# EAGLE board nutzen_02 (EAGLE 9.6.2), part 1 of 3
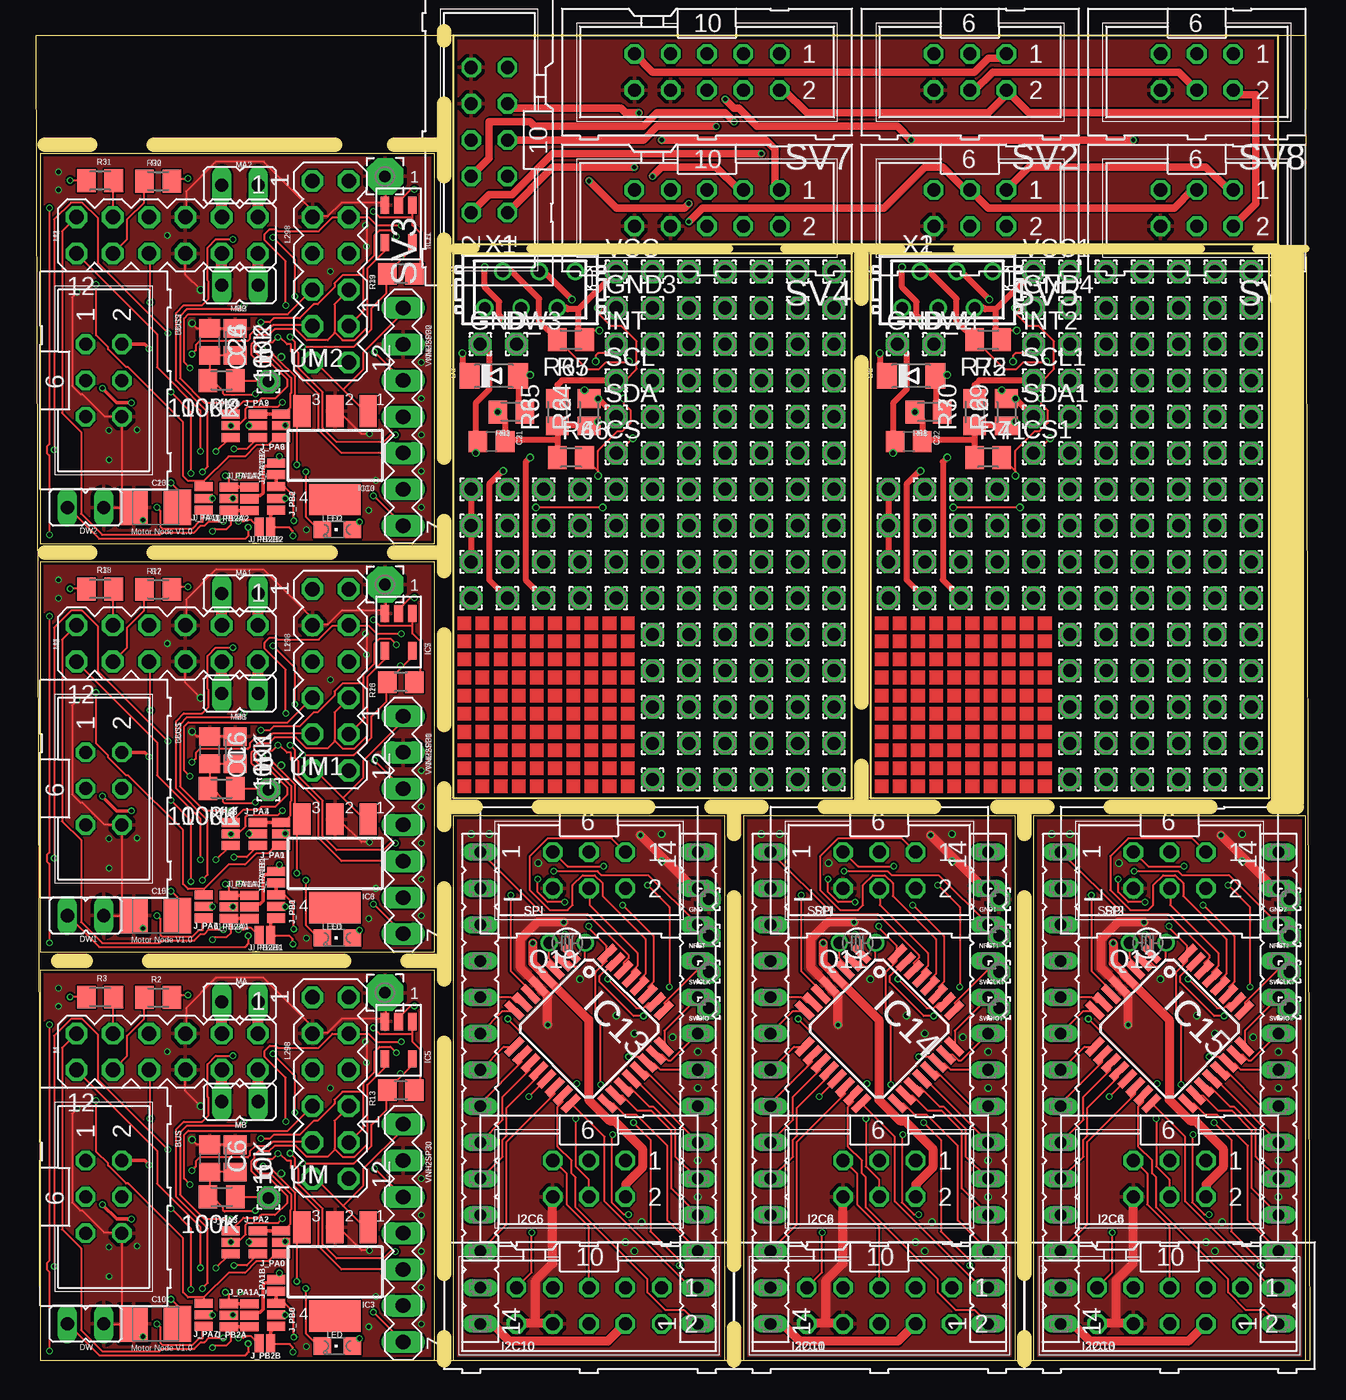
[diagram p0: board, top side]
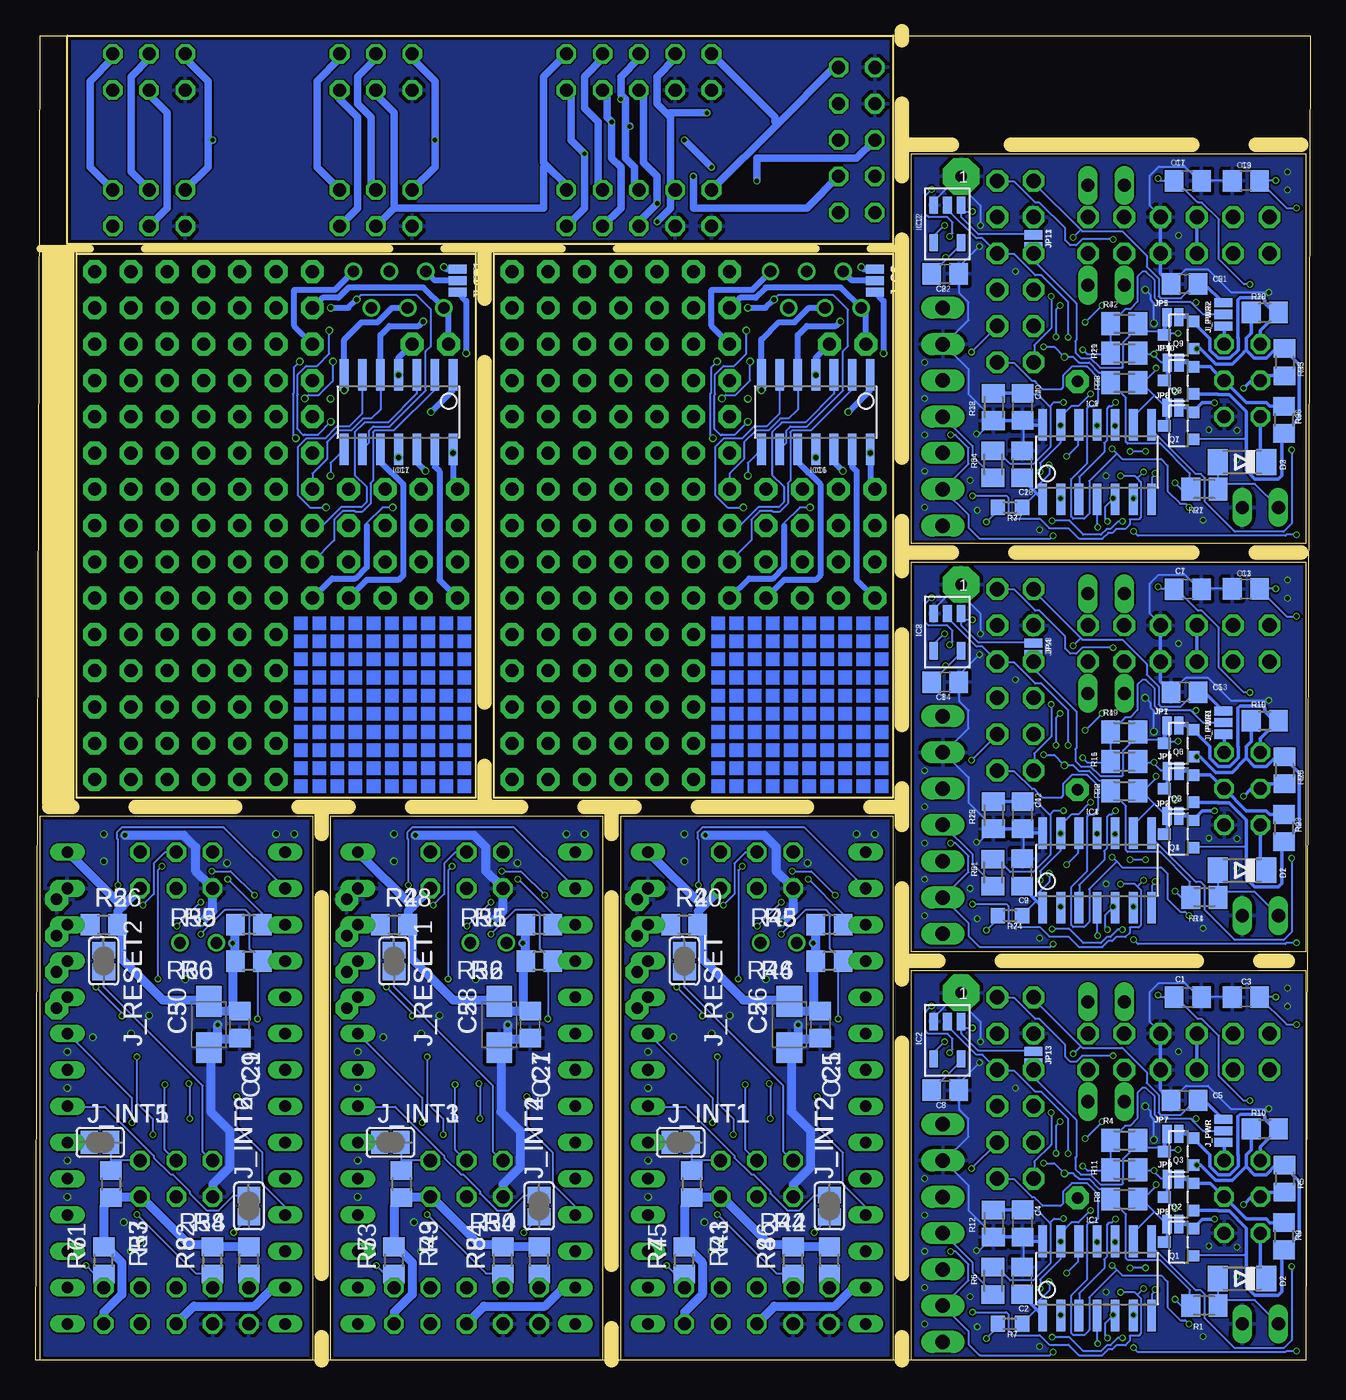
[diagram p1: board, bottom side, seen from below]

Size 89.22 x 92.71 mm. Coordinates in mm from the lower left corner, seen from the top.
Outline: 0.32,0 27.93,0 27.93,27.3 0.32,27.3 0.32,0
Outline: 0.32,0 89.22,0 88.9,92.71 0,92.71 0.32,0
Outline: 0.32,28.57 27.93,28.57 27.93,55.87 0.32,55.87 0.32,28.57
Outline: 0.32,57.15 27.93,57.15 27.93,84.44 0.32,84.44 0.32,57.15
Outline: 29.21,0 48.26,0 48.26,38.1 29.21,38.1 29.21,0
Outline: 49.53,0 68.58,0 68.58,38.1 49.53,38.1 49.53,0
Outline: 69.85,0 88.9,0 88.9,38.1 69.85,38.1 69.85,0
Outline: 29.21,39.37 57.15,39.37 57.15,77.47 29.21,77.47 29.21,39.37
Outline: 58.42,39.37 86.36,39.37 86.36,77.47 58.42,77.47 58.42,39.37
Outline: 29.21,78.11 86.99,78.11 86.99,92.71 29.21,92.71 29.21,78.11
Copper layers (1*16): Top 0.035559375mm / dielectric 1.6mm / Bottom 0.035559375mm
Design rules "jlcpcb2layer": minimum track width 5mil, minimum drill 12mil, track to track 5mil, track to pad 5mil, pad to pad 5mil, via to via 5mil, smd to smd 5mil, copper to edge 8mil, drill to drill 6mil, minimum pad ring 5mil, minimum via ring 3mil, stop-mask expansion 2.5mil, vias tented up to drill 0mil, thermal gap 10mil
Net classes: 1 GND: width 0.635 mm; 2 Power: width 0.635 mm
Milling: 77 lines

## Footprints (pad centres in the part's own frame; a part is rotated, then mirrored left to right if it is on the bottom)
M0805 = smd 1.3 x 1.6: 1 -0.95,0; 2 0.95,0
ML6 = drill 0.914 octagon: 1 -2.54,-1.27; 2 -2.54,1.27; 3 0,-1.27; 4 0,1.27; 5 2.54,-1.27; 6 2.54,1.27
C0805 = smd 1.3 x 1.5: 1 -0.95,0; 2 0.95,0
B/3528-21R = smd 1.95 x 2.5: + 1.525,0; - -1.525,0
B/3528-21W = smd 2.15 x 1.8: + 1.625,0; - -1.625,0
1,6/0,9 = drill 0.914 pad 1.6 octagon: 1 0,0
MINIMELF = smd 1.4 x 1.8: A 1.7,0; C -1.7,0
JP1 = drill 0.914 long: 1 0,-1.27; 2 0,1.27
1,6/0,8 = drill 0.813 pad 1.6 octagon: 1 0,0
ML10 = drill 0.914 octagon: 1 -5.08,-1.27; 2 -5.08,1.27; 3 -2.54,-1.27; 4 -2.54,1.27; 5 0,-1.27; 6 0,1.27; 7 2.54,-1.27; 8 2.54,1.27; 9 5.08,-1.27; 10 5.08,1.27
SOIC14 = smd 0.61 x 2.21: 1 -3.81,-2.603; 2 -2.54,-2.603; 3 -1.27,-2.603; 4 0,-2.603; 5 1.27,-2.603; 6 2.54,-2.603; 7 3.81,-2.603; 8 3.81,2.603; 9 2.54,2.603; 10 1.27,2.603; 11 0,2.603; 12 -1.27,2.603; 13 -2.54,2.603; 14 -3.81,2.603
SOT-23/5 = smd 0.6 x 1.2: 1 -0.95,-1.306; 2 0,-1.306; 3 0.95,-1.306; 4 0.95,1.306; 5 -0.95,1.306
SOT223 = smd 1.219 x 2.235: 1 -2.311,-3.099; 2 0,-3.099; 3 2.311,-3.099 | smd 3.6 x 2.2: 4 0,3.099
LQFP-32 = smd 1.5 x 0.5: 1 -1.8,0; 2 -1.8,-0.8; 3 -1.8,-1.6; 4 -1.8,-2.4; 5 -1.8,-3.2; 6 -1.8,-4; 7 -1.8,-4.8; 8 -1.8,-5.6; 17 7.4,-5.6; 18 7.4,-4.8; 19 7.4,-4; 20 7.4,-3.2; 21 7.4,-2.4; 22 7.4,-1.6; 23 7.4,-0.8; 24 7.4,0 | smd 0.5 x 1.5: 9 0,-7.4; 10 0.8,-7.4; 11 1.6,-7.4; 12 2.4,-7.4; 13 3.2,-7.4; 14 4,-7.4; 15 4.8,-7.4; 16 5.6,-7.4; 25 5.6,1.8; 26 4.8,1.8; 27 4,1.8; 28 3.2,1.8; 29 2.4,1.8; 30 1.6,1.8; 31 0.8,1.8; 32 0,1.8
SMT-JUMPER_3_1-NC_PASTE_NO-SILK = smd 0.635 x 1.27: 1 -0.813,0; 2 0,0; 3 0.813,0
SJ = smd 1.168 x 1.6: 1 -0.762,0; 2 0.762,0
SMT-JUMPER_2_NO_NO-SILK = smd 0.635 x 1.27: 1 -0.406,0; 2 0.406,0
SMT-JUMPER_2_NC_PASTE_NO-SILK = smd 0.635 x 1.27: 1 -0.406,0; 2 0.406,0
FE14 = drill 0.813 long: 1 -15.24,0; 2 -12.7,0; 3 -10.16,0; 4 -7.62,0; 5 -5.08,0; 6 -2.54,0; 7 0,0; 8 2.54,0; 9 5.08,0; 10 7.62,0; 11 10.16,0; 12 12.7,0; 13 15.24,0; 14 17.78,0
MA06-2 = drill 1.016 octagon: 1 -6.35,-1.27; 2 -6.35,1.27; 3 -3.81,-1.27; 4 -3.81,1.27; 5 -1.27,-1.27; 6 -1.27,1.27; 7 1.27,-1.27; 8 1.27,1.27; 9 3.81,-1.27; 10 3.81,1.27; 11 6.35,-1.27; 12 6.35,1.27
CHIPLED_0805 = smd 1.2 x 1.2: A 0,-1.05; C 0,1.05
2,54/0,8 = drill 0.813 pad 2.54 octagon: 1 0,0
SOT23 = smd 0.8 x 0.9: 1 -0.95,-1; 2 0.95,-1; 3 0,1
TC26V = drill 0.813: 1 -1.27,0; 2 1.27,0
R0805 = smd 1.3 x 1.5: 1 -0.95,0; 2 0.95,0
R0603 = smd 1 x 1.1: 1 -0.85,0; 2 0.85,0
MA07-1 = drill 1.016 long: 1 -7.62,0; 2 -5.08,0; 3 -2.54,0; 4 0,0; 5 2.54,0; 6 5.08,0; 7 7.62,0
MICROMATCH-6 = drill 0.813: 1 3.175,1.27; 2 1.905,-1.27; 3 0.635,1.27; 4 -0.635,-1.27; 5 -1.905,1.27; 6 -3.175,-1.27

## Placement (x,y rotation side)
10K  10k  [M0805]  13.96,14.12 270 top
10K1  10k  [M0805]  13.96,42.7 270 top
10K2  10k  [M0805]  13.96,71.27 270 top
100K  10k  [M0805]  13.02,11.43 180 top
100K1  10k  [M0805]  13.02,40.01 180 top
100K2  10k  [M0805]  13.02,68.58 180 top
BUS  [ML6]  4.76,11.43 270 top
BUS1  [ML6]  4.76,40.01 270 top
BUS2  [ML6]  4.76,68.58 270 top
C1  1n  [C0805]  8.57,25.4 180 bottom
C2  100n  [C0805]  20.17,5.56 90 bottom
C3  1n  [C0805]  4.51,25.41 180 bottom
C4  100n  [C0805]  20.15,9.58 90 bottom
C5  0.1  [C0805]  8.8,18.19 180 bottom
C6  100n  [C0805]  12.18,14.12 270 top
C7  1n  [C0805]  8.57,53.98 180 bottom
C8  0.1  [C0805]  25.56,18.89 0 bottom
C9  100n  [C0805]  20.17,34.14 90 bottom
C10  100uF/6V  [B/3528-21R]  8.39,2.54 0 top
C11  1n  [C0805]  4.51,53.98 180 bottom
C12  100n  [C0805]  20.15,38.15 90 bottom
C13  0.1  [C0805]  8.8,46.76 180 bottom
C14  0.1  [C0805]  25.56,47.47 0 bottom
C15  100uF/6V  [B/3528-21R]  8.39,31.11 0 top
C16  100n  [C0805]  12.18,42.7 270 top
C17  1n  [C0805]  8.57,82.55 180 bottom
C18  100n  [C0805]  20.17,62.71 90 bottom
C19  1n  [C0805]  4.51,82.56 180 bottom
C20  100n  [C0805]  20.15,66.73 90 bottom
C21  0.1  [C0805]  8.8,75.34 180 bottom
C22  0.1  [C0805]  25.56,76.04 0 bottom
C23  100uF/6V  [B/3528-21R]  8.39,59.69 0 top
C24  100n  [C0805]  12.18,71.27 270 top
C25  [C0805]  34.29,23.5 270 bottom
C26  [B/3528-21W]  36.45,23.5 90 bottom
C27  [C0805]  54.61,23.5 270 bottom
C28  [B/3528-21W]  56.77,23.5 90 bottom
C29  [C0805]  74.93,23.5 270 bottom
C30  [B/3528-21W]  77.09,23.5 90 bottom
C31  100n  [C0805]  31.9,64.3 180 top
C32  100n  [C0805]  61.11,64.3 180 top
CS  [1,6/0,9]  40.64,63.5 0 top
CS1  [1,6/0,9]  69.85,63.5 0 top
D1  [MINIMELF]  4.76,34.29 180 bottom
D2  [MINIMELF]  4.76,5.71 180 bottom
D3  [MINIMELF]  4.76,62.87 180 bottom
D4  [MINIMELF]  32.07,68.9 0 top
D5  [MINIMELF]  61.28,68.9 0 top
DW  [JP1]  3.49,2.54 270 top
DW1  [JP1]  3.49,31.11 270 top
DW2  [JP1]  3.49,59.69 270 top
DW3  [1,6/0,9]  33.66,71.12 0 top
DW4  [1,6/0,9]  62.87,71.12 0 top
GND  [1,6/0,8]  47.12,32.26 0 top
GND1  [1,6/0,8]  67.44,32.26 0 top
GND2  [1,6/0,8]  87.76,32.26 0 top
GND3  [1,6/0,9]  40.64,73.66 0 top
GND4  [1,6/0,9]  69.85,73.66 0 top
GND_  [1,6/0,9]  31.11,71.12 0 top
GND_1  [1,6/0,9]  60.33,71.12 0 top
I2C1  [ML10]  59.05,3.81 180 top
I2C2  [ML6]  59.05,12.7 180 top
I2C3  [ML10]  79.38,3.81 180 top
I2C4  [ML6]  79.38,12.7 180 top
I2C6  [ML6]  38.73,12.7 180 top
I2C10  [ML10]  38.73,3.81 180 top
IC1  TINY84 or TINY841  [SOIC14]  14.92,5.71 0 bottom
IC2  [SOT-23/5]  25.4,22.39 180 bottom
IC3  MCP1703DB  [SOT223]  20.95,6.19 180 top
IC4  TINY84 or TINY841  [SOIC14]  14.92,34.29 0 bottom
IC5  [SOT-23/5]  25.4,22.39 180 top
IC6  MCP1703DB  [SOT223]  20.95,34.77 180 top
IC7  [SOT-23/5]  25.4,50.97 180 top
IC8  [SOT-23/5]  25.4,50.97 180 bottom
IC9  TINY84 or TINY841  [SOIC14]  14.92,62.87 0 bottom
IC10  MCP1703DB  [SOT223]  20.95,63.34 180 top
IC11  [SOT-23/5]  25.4,79.54 180 top
IC12  [SOT-23/5]  25.4,79.54 180 bottom
IC13  STM32G071  [LQFP-32]  38.73,27.18 315 top
IC14  STM32G071  [LQFP-32]  59.05,27.18 315 top
IC15  STM32G071  [LQFP-32]  79.38,27.18 315 top
IC16  TINY84 or TINY841  [SOIC14]  34.61,66.36 180 bottom
IC17  TINY84 or TINY841  [SOIC14]  63.82,66.36 180 bottom
INT  [1,6/0,9]  40.64,71.12 0 top
INT0  [1,6/0,9]  40.64,60.96 0 top
INT1  [1,6/0,9]  69.85,60.96 0 top
INT2  [1,6/0,9]  69.85,71.12 0 top
J_CS  [SMT-JUMPER_3_1-NC_PASTE_NO-SILK]  30.48,75.56 270 bottom
J_CS1  [SMT-JUMPER_3_1-NC_PASTE_NO-SILK]  59.69,75.56 270 bottom
J_INT1  [SJ]  44.07,15.24 180 bottom
J_INT2  [SJ]  33.66,10.79 90 bottom
J_INT3  [SJ]  64.39,15.24 180 bottom
J_INT4  [SJ]  53.98,10.79 90 bottom
J_INT5  [SJ]  84.71,15.24 180 bottom
J_INT6  [SJ]  74.3,10.79 90 bottom
J_PA0  [SMT-JUMPER_3_1-NC_PASTE_NO-SILK]  17.18,8.26 270 top
J_PA1  [SMT-JUMPER_3_1-NC_PASTE_NO-SILK]  17.18,36.83 270 top
J_PA1A  [SMT-JUMPER_3_1-NC_PASTE_NO-SILK]  14.96,3.14 270 top
J_PA1A1  [SMT-JUMPER_3_1-NC_PASTE_NO-SILK]  14.96,31.72 270 top
J_PA1A2  [SMT-JUMPER_3_1-NC_PASTE_NO-SILK]  14.96,60.29 270 top
J_PA1B  [SMT-JUMPER_2_NO_NO-SILK]  16.83,5.24 270 top
J_PA1B1  [SMT-JUMPER_2_NO_NO-SILK]  16.83,33.81 270 top
J_PA1B2  [SMT-JUMPER_2_NO_NO-SILK]  16.83,62.39 270 top
J_PA2  [SMT-JUMPER_3_1-NC_PASTE_NO-SILK]  15.56,8.26 90 top
J_PA3  [SMT-JUMPER_3_1-NC_PASTE_NO-SILK]  13.65,8.26 90 top
J_PA4  [SMT-JUMPER_3_1-NC_PASTE_NO-SILK]  15.56,36.83 90 top
J_PA5  [SMT-JUMPER_3_1-NC_PASTE_NO-SILK]  13.65,36.83 90 top
J_PA6  [SMT-JUMPER_3_1-NC_PASTE_NO-SILK]  11.75,31.75 270 top
J_PA7  [SMT-JUMPER_3_1-NC_PASTE_NO-SILK]  11.75,3.17 270 top
J_PA8  [SMT-JUMPER_3_1-NC_PASTE_NO-SILK]  17.18,65.41 270 top
J_PA9  [SMT-JUMPER_3_1-NC_PASTE_NO-SILK]  15.56,65.41 90 top
J_PA10  [SMT-JUMPER_3_1-NC_PASTE_NO-SILK]  13.65,65.41 90 top
J_PA11  [SMT-JUMPER_3_1-NC_PASTE_NO-SILK]  11.75,60.33 270 top
J_PB0  [SMT-JUMPER_3_1-NC_PASTE_NO-SILK]  16.83,3.17 270 top
J_PB1  [SMT-JUMPER_3_1-NC_PASTE_NO-SILK]  16.83,31.75 270 top
J_PB2  [SMT-JUMPER_3_1-NC_PASTE_NO-SILK]  16.83,60.33 270 top
J_PB2A  [SMT-JUMPER_3_1-NC_PASTE_NO-SILK]  13.53,3.15 90 top
J_PB2A1  [SMT-JUMPER_3_1-NC_PASTE_NO-SILK]  13.53,31.72 90 top
J_PB2A2  [SMT-JUMPER_3_1-NC_PASTE_NO-SILK]  13.53,60.3 90 top
J_PB2B  [SMT-JUMPER_2_NO_NO-SILK]  16.05,1.18 180 top
J_PB2B1  [SMT-JUMPER_2_NO_NO-SILK]  16.05,29.76 180 top
J_PB2B2  [SMT-JUMPER_2_NO_NO-SILK]  16.05,58.33 180 top
J_PWR  [SMT-JUMPER_3_1-NC_PASTE_NO-SILK]  6.08,16.05 270 bottom
J_PWR1  [SMT-JUMPER_3_1-NC_PASTE_NO-SILK]  6.08,44.63 270 bottom
J_PWR2  [SMT-JUMPER_3_1-NC_PASTE_NO-SILK]  6.08,73.2 270 bottom
J_RESET  [SJ]  43.82,27.94 90 bottom
J_RESET1  [SJ]  64.14,27.94 90 bottom
J_RESET2  [SJ]  84.45,27.94 90 bottom
JP1  [SMT-JUMPER_2_NC_PASTE_NO-SILK]  9.61,44.42 180 bottom
JP2  [SMT-JUMPER_2_NC_PASTE_NO-SILK]  9.61,38.1 180 bottom
JP3  [SMT-JUMPER_2_NC_PASTE_NO-SILK]  9.59,41.25 180 bottom
JP4  [SMT-JUMPER_2_NO_NO-SILK]  19.39,49.78 90 bottom
JP5  [SMT-JUMPER_2_NC_PASTE_NO-SILK]  9.61,73 180 bottom
JP6  [SMT-JUMPER_2_NC_PASTE_NO-SILK]  9.61,66.67 180 bottom
JP7  [SMT-JUMPER_2_NC_PASTE_NO-SILK]  9.61,15.85 180 bottom
JP8  [SMT-JUMPER_2_NC_PASTE_NO-SILK]  9.61,9.53 180 bottom
JP9  [SMT-JUMPER_2_NC_PASTE_NO-SILK]  9.59,12.67 180 bottom
JP10  [SMT-JUMPER_2_NC_PASTE_NO-SILK]  9.59,69.82 180 bottom
JP11  [SMT-JUMPER_2_NO_NO-SILK]  19.39,78.36 90 bottom
JP13  [SMT-JUMPER_2_NO_NO-SILK]  19.39,21.21 90 bottom
L  [FE14]  31.11,20.32 270 top
L1  [MA06-2]  20.64,47.62 270 top
L2  [MA06-2]  20.64,76.2 270 top
L3  [FE14]  51.44,20.32 270 top
L4  [FE14]  71.75,20.32 270 top
L298  [MA06-2]  20.64,19.05 270 top
LED  [CHIPLED_0805]  21.12,0.99 90 top
LED1  [CHIPLED_0805]  21.12,29.57 90 top
LED2  [CHIPLED_0805]  21.12,58.14 90 top
M  [MA06-2]  9.21,21.59 180 top
M1  [MA06-2]  9.21,50.16 180 top
M2  [MA06-2]  9.21,78.74 180 top
MA  [JP1]  14.29,25.08 270 top
MA1  [JP1]  14.29,53.66 270 top
MA2  [JP1]  14.29,82.23 270 top
MB  [JP1]  14.29,18.1 90 top
MB1  [JP1]  14.29,46.67 90 top
MB2  [JP1]  14.29,75.25 90 top
NRST  [1,6/0,8]  47.12,29.72 0 top
NRST1  [1,6/0,8]  67.44,29.72 0 top
NRST2  [1,6/0,8]  87.76,29.72 0 top
P_UM  [1,6/0,8]  16.29,11.35 0 top
P_UM1  [1,6/0,8]  16.29,39.93 0 top
P_UM2  [1,6/0,8]  16.29,68.5 0 top
PA0  [1,6/0,9]  30.48,53.34 0 top
PA1  [1,6/0,9]  33.02,53.34 0 top
PA2  [1,6/0,9]  35.56,53.34 0 top
PA3  [1,6/0,9]  38.1,53.34 0 top
PA4  [1,6/0,9]  59.69,53.34 0 top
PA5  [1,6/0,9]  62.23,53.34 0 top
PA6  [1,6/0,9]  64.77,53.34 0 top
PA7  [1,6/0,9]  40.64,53.34 0 top
PA8  [1,6/0,9]  67.31,53.34 0 top
PA9  [1,6/0,9]  69.85,53.34 0 top
PAD1  [2,54/0,8]  24.45,25.72 0 top
PAD2  [2,54/0,8]  24.45,54.29 0 top
PAD3  [2,54/0,8]  24.45,82.87 0 top
PAD4  [1,6/0,9]  43.18,40.64 0 top
PAD5  [1,6/0,9]  45.72,40.64 0 top
PAD6  [1,6/0,9]  48.26,40.64 0 top
PAD7  [1,6/0,9]  50.8,40.64 0 top
PAD8  [1,6/0,9]  53.34,40.64 0 top
PAD9  [1,6/0,9]  55.88,40.64 0 top
PAD10  [1,6/0,9]  53.34,43.18 0 top
PAD11  [1,6/0,9]  50.8,43.18 0 top
PAD12  [1,6/0,9]  55.88,43.18 0 top
PAD13  [1,6/0,9]  43.18,43.18 0 top
PAD14  [1,6/0,9]  48.26,43.18 0 top
PAD15  [1,6/0,9]  45.72,43.18 0 top
PAD16  [1,6/0,9]  43.18,45.72 0 top
PAD17  [1,6/0,9]  45.72,45.72 0 top
PAD18  [1,6/0,9]  50.8,45.72 0 top
PAD19  [1,6/0,9]  48.26,45.72 0 top
PAD20  [1,6/0,9]  55.88,45.72 0 top
PAD21  [1,6/0,9]  53.34,45.72 0 top
PAD22  [1,6/0,9]  43.18,48.26 0 top
PAD23  [1,6/0,9]  45.72,48.26 0 top
PAD24  [1,6/0,9]  48.26,48.26 0 top
PAD25  [1,6/0,9]  50.8,48.26 0 top
PAD26  [1,6/0,9]  55.88,48.26 0 top
PAD27  [1,6/0,9]  53.34,48.26 0 top
PAD28  [1,6/0,9]  43.18,50.8 0 top
PAD29  [1,6/0,9]  53.34,58.42 0 top
PAD30  [1,6/0,9]  55.88,58.42 0 top
PAD31  [1,6/0,9]  43.18,58.42 0 top
PAD32  [1,6/0,9]  48.26,58.42 0 top
PAD33  [1,6/0,9]  50.8,58.42 0 top
PAD34  [1,6/0,9]  50.8,55.88 0 top
PAD35  [1,6/0,9]  55.88,55.88 0 top
PAD36  [1,6/0,9]  45.72,58.42 0 top
PAD37  [1,6/0,9]  43.18,55.88 0 top
PAD38  [1,6/0,9]  45.72,55.88 0 top
PAD39  [1,6/0,9]  53.34,55.88 0 top
PAD40  [1,6/0,9]  43.18,53.34 0 top
PAD41  [1,6/0,9]  45.72,53.34 0 top
PAD42  [1,6/0,9]  48.26,55.88 0 top
PAD43  [1,6/0,9]  50.8,50.8 0 top
PAD44  [1,6/0,9]  55.88,50.8 0 top
PAD45  [1,6/0,9]  55.88,53.34 0 top
PAD46  [1,6/0,9]  48.26,50.8 0 top
PAD47  [1,6/0,9]  53.34,50.8 0 top
PAD48  [1,6/0,9]  53.34,53.34 0 top
PAD49  [1,6/0,9]  45.72,50.8 0 top
PAD50  [1,6/0,9]  48.26,53.34 0 top
PAD51  [1,6/0,9]  50.8,53.34 0 top
PAD52  [1,6/0,9]  43.18,60.96 0 top
PAD53  [1,6/0,9]  48.26,60.96 0 top
PAD54  [1,6/0,9]  45.72,63.5 0 top
PAD55  [1,6/0,9]  43.18,63.5 0 top
PAD56  [1,6/0,9]  53.34,60.96 0 top
PAD57  [1,6/0,9]  45.72,60.96 0 top
PAD58  [1,6/0,9]  50.8,60.96 0 top
PAD59  [1,6/0,9]  50.8,63.5 0 top
PAD60  [1,6/0,9]  48.26,63.5 0 top
PAD61  [1,6/0,9]  55.88,60.96 0 top
PAD62  [1,6/0,9]  50.8,66.04 0 top
PAD63  [1,6/0,9]  48.26,66.04 0 top
PAD64  [1,6/0,9]  45.72,66.04 0 top
PAD65  [1,6/0,9]  53.34,63.5 0 top
PAD66  [1,6/0,9]  55.88,63.5 0 top
PAD67  [1,6/0,9]  55.88,66.04 0 top
PAD68  [1,6/0,9]  45.72,68.58 0 top
PAD69  [1,6/0,9]  43.18,68.58 0 top
PAD70  [1,6/0,9]  53.34,66.04 0 top
PAD71  [1,6/0,9]  43.18,66.04 0 top
PAD72  [1,6/0,9]  48.26,68.58 0 top
PAD73  [1,6/0,9]  50.8,68.58 0 top
PAD74  [1,6/0,9]  53.34,68.58 0 top
PAD75  [1,6/0,9]  43.18,71.12 0 top
PAD76  [1,6/0,9]  55.88,68.58 0 top
PAD77  [1,6/0,9]  45.72,71.12 0 top
PAD78  [1,6/0,9]  48.26,71.12 0 top
PAD79  [1,6/0,9]  50.8,71.12 0 top
PAD80  [1,6/0,9]  55.88,71.12 0 top
PAD81  [1,6/0,9]  53.34,71.12 0 top
PAD82  [1,6/0,9]  48.26,73.66 0 top
PAD83  [1,6/0,9]  45.72,73.66 0 top
PAD84  [1,6/0,9]  50.8,73.66 0 top
PAD85  [1,6/0,9]  53.34,73.66 0 top
PAD86  [1,6/0,9]  43.18,73.66 0 top
PAD87  [1,6/0,9]  50.8,76.2 0 top
PAD88  [1,6/0,9]  48.26,76.2 0 top
PAD89  [1,6/0,9]  43.18,76.2 0 top
PAD90  [1,6/0,9]  45.72,76.2 0 top
PAD91  [1,6/0,9]  55.88,73.66 0 top
PAD92  [1,6/0,9]  55.88,76.2 0 top
PAD93  [1,6/0,9]  53.34,76.2 0 top
PAD94  [1,6/0,9]  33.02,60.96 0 top
PAD95  [1,6/0,9]  33.02,58.42 0 top
PAD96  [1,6/0,9]  35.56,55.88 0 top
PAD97  [1,6/0,9]  38.1,55.88 0 top
PAD98  [1,6/0,9]  38.1,58.42 0 top
PAD99  [1,6/0,9]  33.02,55.88 0 top
PAD100  [1,6/0,9]  38.1,60.96 0 top
PAD101  [1,6/0,9]  35.56,60.96 0 top
PAD102  [1,6/0,9]  35.56,58.42 0 top
PAD103  [1,6/0,9]  30.48,55.88 0 top
PAD104  [1,6/0,9]  30.48,60.96 0 top
PAD105  [1,6/0,9]  30.48,58.42 0 top
PAD106  [1,6/0,9]  72.39,40.64 0 top
PAD107  [1,6/0,9]  74.93,40.64 0 top
PAD108  [1,6/0,9]  77.47,40.64 0 top
PAD109  [1,6/0,9]  80.01,40.64 0 top
PAD110  [1,6/0,9]  82.55,40.64 0 top
PAD111  [1,6/0,9]  85.09,40.64 0 top
PAD112  [1,6/0,9]  82.55,43.18 0 top
PAD113  [1,6/0,9]  80.01,43.18 0 top
PAD114  [1,6/0,9]  85.09,43.18 0 top
PAD115  [1,6/0,9]  72.39,43.18 0 top
PAD116  [1,6/0,9]  77.47,43.18 0 top
PAD117  [1,6/0,9]  74.93,43.18 0 top
PAD118  [1,6/0,9]  72.39,45.72 0 top
PAD119  [1,6/0,9]  74.93,45.72 0 top
PAD120  [1,6/0,9]  80.01,45.72 0 top
PAD121  [1,6/0,9]  77.47,45.72 0 top
PAD122  [1,6/0,9]  85.09,45.72 0 top
PAD123  [1,6/0,9]  82.55,45.72 0 top
PAD124  [1,6/0,9]  72.39,48.26 0 top
PAD125  [1,6/0,9]  74.93,48.26 0 top
PAD126  [1,6/0,9]  77.47,48.26 0 top
PAD127  [1,6/0,9]  80.01,48.26 0 top
PAD128  [1,6/0,9]  85.09,48.26 0 top
PAD129  [1,6/0,9]  82.55,48.26 0 top
PAD130  [1,6/0,9]  72.39,50.8 0 top
PAD131  [1,6/0,9]  82.55,58.42 0 top
PAD132  [1,6/0,9]  85.09,58.42 0 top
PAD133  [1,6/0,9]  72.39,58.42 0 top
PAD134  [1,6/0,9]  77.47,58.42 0 top
PAD135  [1,6/0,9]  80.01,58.42 0 top
PAD136  [1,6/0,9]  80.01,55.88 0 top
PAD137  [1,6/0,9]  85.09,55.88 0 top
PAD138  [1,6/0,9]  74.93,58.42 0 top
PAD139  [1,6/0,9]  72.39,55.88 0 top
PAD140  [1,6/0,9]  74.93,55.88 0 top
PAD141  [1,6/0,9]  82.55,55.88 0 top
PAD142  [1,6/0,9]  72.39,53.34 0 top
PAD143  [1,6/0,9]  74.93,53.34 0 top
PAD144  [1,6/0,9]  77.47,55.88 0 top
PAD145  [1,6/0,9]  80.01,50.8 0 top
PAD146  [1,6/0,9]  85.09,50.8 0 top
PAD147  [1,6/0,9]  85.09,53.34 0 top
PAD148  [1,6/0,9]  77.47,50.8 0 top
PAD149  [1,6/0,9]  82.55,50.8 0 top
PAD150  [1,6/0,9]  82.55,53.34 0 top
PAD151  [1,6/0,9]  74.93,50.8 0 top
PAD152  [1,6/0,9]  77.47,53.34 0 top
PAD153  [1,6/0,9]  80.01,53.34 0 top
PAD154  [1,6/0,9]  72.39,60.96 0 top
PAD155  [1,6/0,9]  77.47,60.96 0 top
PAD156  [1,6/0,9]  74.93,63.5 0 top
PAD157  [1,6/0,9]  72.39,63.5 0 top
PAD158  [1,6/0,9]  82.55,60.96 0 top
PAD159  [1,6/0,9]  74.93,60.96 0 top
PAD160  [1,6/0,9]  80.01,60.96 0 top
PAD161  [1,6/0,9]  80.01,63.5 0 top
PAD162  [1,6/0,9]  77.47,63.5 0 top
PAD163  [1,6/0,9]  85.09,60.96 0 top
PAD164  [1,6/0,9]  80.01,66.04 0 top
PAD165  [1,6/0,9]  77.47,66.04 0 top
PAD166  [1,6/0,9]  74.93,66.04 0 top
PAD167  [1,6/0,9]  82.55,63.5 0 top
PAD168  [1,6/0,9]  85.09,63.5 0 top
PAD169  [1,6/0,9]  85.09,66.04 0 top
PAD170  [1,6/0,9]  74.93,68.58 0 top
PAD171  [1,6/0,9]  72.39,68.58 0 top
PAD172  [1,6/0,9]  82.55,66.04 0 top
PAD173  [1,6/0,9]  72.39,66.04 0 top
PAD174  [1,6/0,9]  77.47,68.58 0 top
PAD175  [1,6/0,9]  80.01,68.58 0 top
PAD176  [1,6/0,9]  82.55,68.58 0 top
PAD177  [1,6/0,9]  72.39,71.12 0 top
PAD178  [1,6/0,9]  85.09,68.58 0 top
PAD179  [1,6/0,9]  74.93,71.12 0 top
PAD180  [1,6/0,9]  77.47,71.12 0 top
PAD181  [1,6/0,9]  80.01,71.12 0 top
PAD182  [1,6/0,9]  85.09,71.12 0 top
PAD183  [1,6/0,9]  82.55,71.12 0 top
PAD184  [1,6/0,9]  77.47,73.66 0 top
PAD185  [1,6/0,9]  74.93,73.66 0 top
PAD186  [1,6/0,9]  80.01,73.66 0 top
PAD187  [1,6/0,9]  82.55,73.66 0 top
PAD188  [1,6/0,9]  72.39,73.66 0 top
PAD189  [1,6/0,9]  80.01,76.2 0 top
PAD190  [1,6/0,9]  77.47,76.2 0 top
PAD191  [1,6/0,9]  72.39,76.2 0 top
PAD192  [1,6/0,9]  74.93,76.2 0 top
PAD193  [1,6/0,9]  85.09,73.66 0 top
PAD194  [1,6/0,9]  85.09,76.2 0 top
PAD195  [1,6/0,9]  82.55,76.2 0 top
PAD196  [1,6/0,9]  62.23,60.96 0 top
PAD197  [1,6/0,9]  62.23,58.42 0 top
PAD198  [1,6/0,9]  64.77,55.88 0 top
PAD199  [1,6/0,9]  67.31,55.88 0 top
PAD200  [1,6/0,9]  67.31,58.42 0 top
PAD201  [1,6/0,9]  62.23,55.88 0 top
PAD202  [1,6/0,9]  67.31,60.96 0 top
PAD203  [1,6/0,9]  64.77,60.96 0 top
PAD204  [1,6/0,9]  64.77,58.42 0 top
PAD205  [1,6/0,9]  59.69,55.88 0 top
PAD206  [1,6/0,9]  59.69,60.96 0 top
PAD207  [1,6/0,9]  59.69,58.42 0 top
PB0  [1,6/0,9]  40.64,55.88 0 top
PB1  [1,6/0,9]  40.64,58.42 0 top
PB2  [1,6/0,9]  69.85,55.88 0 top
PB3  [1,6/0,9]  69.85,58.42 0 top
Q1  BSS138  [SOT23]  9.21,8.26 90 bottom
Q2  BSS138  [SOT23]  9.21,11.43 90 bottom
Q3  BSS138  [SOT23]  9.21,14.61 90 bottom
Q4  BSS138  [SOT23]  9.21,36.83 90 bottom
Q5  BSS138  [SOT23]  9.21,40.01 90 bottom
Q6  BSS138  [SOT23]  9.21,43.18 90 bottom
Q7  BSS138  [SOT23]  9.21,65.41 90 bottom
Q8  BSS138  [SOT23]  9.21,68.58 90 bottom
Q9  BSS138  [SOT23]  9.21,71.75 90 bottom
Q10  [TC26V]  37.21,29.21 0 top
Q11  [TC26V]  57.53,29.21 0 top
Q12  [TC26V]  77.85,29.21 0 top
R  [FE14]  46.36,17.78 90 top
R1  10k  [M0805]  7.41,3.82 0 bottom
R2  1k  [M0805]  8.57,25.39 180 top
R3  1k  [M0805]  4.51,25.41 0 top
R4  10k  [M0805]  13.02,15.4 180 bottom
R5  10k  [R0805]  1.79,12.71 270 bottom
R6  10k  [M0805]  22.21,5.56 90 bottom
R7  1k  [R0603]  21.02,2.54 0 bottom
R8  10k  [M0805]  13.02,11.27 180 bottom
R9  10k  [R0805]  1.82,8.67 90 bottom
R10  10k  [R0805]  3.17,16.19 0 bottom
R11  10k  [M0805]  13.02,13.34 180 bottom
R12  10k  [M0805]  22.17,9.57 90 bottom
R13  10k  [R0805]  25.56,18.89 180 top
R14  10k  [M0805]  7.41,32.4 0 bottom
R15  10k  [R0805]  3.17,44.77 0 bottom
R16  10k  [M0805]  13.02,41.91 180 bottom
R17  1k  [M0805]  8.57,53.96 180 top
R18  1k  [M0805]  4.51,53.99 0 top
R19  10k  [M0805]  13.02,43.97 180 bottom
R20  10k  [R0805]  1.79,41.29 270 bottom
R21  10k  [M0805]  22.21,34.13 90 bottom
R22  10k  [M0805]  13.02,39.85 180 bottom
R23  10k  [R0805]  1.82,37.25 90 bottom
R24  1k  [R0603]  21.02,31.11 0 bottom
R25  10k  [M0805]  22.17,38.14 90 bottom
R26  10k  [R0805]  25.56,47.47 180 top
R27  10k  [M0805]  7.41,60.97 0 bottom
R28  10k  [R0805]  3.17,73.34 0 bottom
R29  10k  [M0805]  13.02,70.48 180 bottom
R30  1k  [M0805]  8.57,82.54 180 top
R31  1k  [M0805]  4.51,82.56 0 top
R32  10k  [M0805]  13.02,72.55 180 bottom
R33  10k  [R0805]  1.79,69.86 270 bottom
R34  10k  [M0805]  22.21,62.71 90 bottom
R35  10k  [M0805]  13.02,68.42 180 bottom
R36  10k  [R0805]  1.82,65.82 90 bottom
R37  1k  [R0603]  21.02,59.69 0 bottom
R38  10k  [M0805]  22.17,66.72 90 bottom
R39  10k  [R0805]  25.56,76.04 180 top
R40  [R0805]  43.82,30.48 0 bottom
R41  [R0805]  43.31,12.32 270 bottom
R42  [R0805]  33.66,6.99 90 bottom
R43  [R0805]  33.66,30.48 180 bottom
R44  [R0805]  33.66,27.94 180 bottom
R45  [R0805]  43.82,6.99 90 bottom
R46  [R0805]  36.2,6.99 90 bottom
R47  [FE14]  66.67,17.78 90 top
R48  [R0805]  64.14,30.48 0 bottom
R49  [R0805]  63.63,12.32 270 bottom
R50  [R0805]  53.98,6.99 90 bottom
R51  [R0805]  53.98,30.48 180 bottom
R52  [R0805]  53.98,27.94 180 bottom
R53  [R0805]  64.14,6.99 90 bottom
R54  [R0805]  56.52,6.99 90 bottom
R55  [FE14]  86.99,17.78 90 top
R56  [R0805]  84.45,30.48 0 bottom
R57  [R0805]  83.95,12.32 270 bottom
R58  [R0805]  74.3,6.99 90 bottom
R59  [R0805]  74.3,30.48 180 bottom
R60  [R0805]  74.3,27.94 180 bottom
R61  [R0805]  84.45,6.99 90 bottom
R62  [R0805]  76.83,6.99 90 bottom
R63  10k  [M0805]  33.29,66.37 0 top
R64  10k  [M0805]  38.73,66.36 90 top
R65  10k  [M0805]  36.51,66.36 90 top
R66  10k  [M0805]  37.47,63.18 0 top
R67  10k  [M0805]  37.47,71.44 180 top
R68  10k  [M0805]  62.5,66.37 0 top
R69  10k  [M0805]  67.94,66.36 90 top
R70  10k  [M0805]  65.72,66.36 90 top
R71  10k  [M0805]  66.67,63.18 0 top
R72  10k  [M0805]  66.67,71.44 180 top
SCL  [1,6/0,9]  40.64,68.58 0 top
SCL1  [1,6/0,9]  69.85,68.58 0 top
SDA  [1,6/0,9]  40.64,66.04 0 top
SDA1  [1,6/0,9]  69.85,66.04 0 top
SPI  [ML6]  38.73,34.29 180 top
SPI1  [ML6]  59.05,34.29 180 top
SPI2  [ML6]  79.38,34.29 180 top
SV1  [ML6]  81.28,80.64 180 top
SV2  [ML6]  65.41,90.17 180 top
SV3  [ML10]  31.75,85.41 90 top
SV4  [ML10]  46.99,80.64 180 top
SV5  [ML6]  65.41,80.64 180 top
SV7  [ML10]  46.99,90.17 180 top
SV8  [ML6]  81.28,90.17 180 top
SWCLK  [1,6/0,8]  47.12,27.18 0 top
SWCLK1  [1,6/0,8]  67.44,27.18 0 top
SWCLK2  [1,6/0,8]  87.76,27.18 0 top
SWDIO  [1,6/0,8]  47.12,24.64 0 top
SWDIO1  [1,6/0,8]  67.44,24.64 0 top
SWDIO2  [1,6/0,8]  87.76,24.64 0 top
VCC  [1,6/0,9]  40.64,76.2 0 top
VCC1  [1,6/0,9]  69.85,76.2 0 top
VNH2SP1  [MA07-1]  25.72,37.47 270 top
VNH2SP2  [MA07-1]  25.72,66.04 270 top
VNH2SP30  [MA07-1]  25.72,8.89 270 top
X1  BUS  [MICROMATCH-6]  34.61,74.93 0 top
X2  BUS  [MICROMATCH-6]  63.82,74.93 0 top

## Library data of the parts
10K 10K1 10K2 100K 100K1 100K2 R1-R4 R6-R8 R11 R12 R14 R16-R19 R21 R22 R24 R25 R27 R29-R32 R34 R35 R37 R38 R40-R46 R48-R54 R56-R72 = rcl; SPICEPREFIX: R
BUS BUS1 BUS2 I2C1-I2C4 I2C6 I2C10 SPI SPI1 SPI2 SV1-SV5 SV7 SV8 = con-harting-ml; OC_FARNELL: unknown; OC_NEWARK: unknown
C1-C24 C31 C32 R5 R9 R10 R13 R15 R20 R23 R26 R28 R33 R36 R39 = rcl
C25-C30 = rcl; SPICEPREFIX: C
CS CS1 DW3 DW4 GND GND1-GND4 GND_ GND_1 INT INT0 INT1 INT2 NRST NRST1 NRST2 P_UM P_UM1 P_UM2 PA0 PA1-PA9 PAD1-PAD207 PB0 PB1-PB3 SCL SCL1 SDA SDA1 SWCLK SWCLK1 SWCLK2 SWDIO SWDIO1 SWDIO2 VCC VCC1 = wirepad
D1-D5 = diode
DW DW1 DW2 J_INT1-J_INT6 J_RESET J_RESET1 J_RESET2 MA MA1 MA2 MB MB1 MB2 = jumper
IC1 IC4 IC9 IC16 IC17 = avr-7
IC2 IC5 IC7 IC8 IC11 IC12 = picogate
IC3 IC6 IC10 = linear
IC13-IC15 = STM32
J_CS J_CS1 J_PA0 J_PA1 J_PA1A J_PA1A1 J_PA1A2 J_PA1B J_PA1B1 J_PA1B2 J_PA2-J_PA11 J_PB0 J_PB1 J_PB2 J_PB2A J_PB2A1 J_PB2A2 J_PB2B J_PB2B1 J_PB2B2 J_PWR J_PWR1 J_PWR2 JP1-JP11 JP13 = SparkFun-Jumpers
L L3 L4 R R47 R55 = con-lsta-my
L1 L2 L298 M M1 M2 VNH2SP1 VNH2SP2 VNH2SP30 = con-lstb; OC_FARNELL: unknown; OC_NEWARK: unknown
LED LED1 LED2 = led
Q1-Q9 = bss138_10; MF: Fairchild; MPN: BSS138; OC_FARNELL: 9845330; OC_NEWARK: 67R2009
Q10-Q12 = crystal; OC_FARNELL: unknown; OC_NEWARK: unknown
X1 X2 = con-amp-micromatch; MPN: 7-215464-6; OC_FARNELL: 3784630; OC_NEWARK: 19R8125

## Nets
BUS_INT: BUS.1 JP7.1 Q3.2 R10.2
BUS_INT1: BUS1.1 JP1.1 Q6.2 R15.2
BUS_INT2: BUS2.1 JP5.1 Q9.2 R28.2
BUS_INT3: IC16.8 INT.1 R66.2 X1.1
BUS_INT4: IC17.8 INT2.1 R71.2 X2.1
BUS_P1: CS1.1 J_CS1.2 R72.2 X2.5
BUS_P5: CS.1 J_CS.2 R67.2 X1.5
BUS_RESET: BUS.5 D2.C
BUS_RESET1: BUS1.5 D1.C
BUS_RESET2: BUS2.5 D3.C
BUS_RESET3: I2C6.5 I2C10.5 J_RESET.1
BUS_RESET4: I2C1.5 I2C2.5 J_RESET1.1
BUS_RESET5: I2C3.5 I2C4.5 J_RESET2.1
BUS_RESET6: D4.C J_CS.3
BUS_RESET7: D5.C J_CS1.3
BUS_SCL: BUS.3 JP8.1 Q1.2 R5.2
BUS_SCL1: BUS1.3 JP2.1 Q4.2 R20.2
BUS_SCL2: BUS2.3 JP6.1 Q7.2 R33.2
BUS_SCL3: IC16.9 R65.2 SCL.1 X1.3
BUS_SCL4: IC17.9 R70.2 SCL1.1 X2.3
BUS_SDA: BUS.4 JP9.1 Q2.2 R9.2
BUS_SDA1: BUS1.4 JP3.1 Q5.2 R23.2
BUS_SDA2: BUS2.4 JP10.1 Q8.2 R36.2
BUS_SDA3: IC16.7 R64.2 SDA.1 X1.4
BUS_SDA4: IC17.7 R69.2 SDA1.1 X2.4
DEBUGWIRE: D2.A DW.1 IC1.4 R1.2
DEBUGWIRE1: D1.A DW1.1 IC4.4 R14.2
DEBUGWIRE2: D3.A DW2.1 IC9.4 R27.2
DW: D4.A DW3.1 IC16.4 R63.2
DW1: D5.A DW4.1 IC17.4 R68.2
FON: SV3.3 SV4.3 SV7.3
FON1: I2C1.3
FON2: I2C10.3
FON3: I2C3.3
GND: 10K.1 BUS.6 C1.1 C2.2 C3.2 C4.1 C5.2 C6.1 C8.2 C10.- DW.2 IC1.14 IC2.3 IC3.2 IC5.3 L298.3 M.5 M.6 PAD1.1 R12.1 VNH2SP30.2
GND1: 10K1.1 BUS1.6 C7.1 C9.2 C11.2 C12.1 C13.2 C14.2 C15.- C16.1 DW1.2 IC4.14 IC6.2 IC7.3 IC8.3 L1.3 M1.5 M1.6 PAD2.1 R25.1 VNH2SP1.2
GND2: 10K2.1 BUS2.6 C17.1 C18.2 C19.2 C20.1 C21.2 C22.2 C23.- C24.1 DW2.2 IC9.14 IC10.2 IC11.3 IC12.3 L2.3 M2.5 M2.6 PAD3.1 R38.1 VNH2SP2.2
GND3 [GND]: C25.2 C26.- GND.1 I2C6.6 I2C10.8 I2C10.10 IC13.5 R.13 SPI.6
GND4 [GND]: C27.2 C28.- GND1.1 I2C1.8 I2C1.10 I2C2.6 IC14.5 R47.13 SPI1.6
GND5 [GND]: C29.2 C30.- GND2.1 I2C3.8 I2C3.10 I2C4.6 IC15.5 R55.13 SPI2.6
GND6: C31.2 GND3.1 GND_.1 IC16.14 PAD103.1 PAD104.1 PAD105.1 X1.6
GND7: C32.2 GND4.1 GND_1.1 IC17.14 PAD205.1 PAD206.1 PAD207.1 X2.6
GND8: SV1.6 SV2.6 SV3.8 SV3.10 SV4.8 SV4.10 SV5.6 SV7.8 SV7.10 SV8.6
INT: SV1.1 SV2.1 SV3.9 SV4.9 SV5.1 SV7.9 SV8.1
INT0: IC16.5 INT0.1 J_CS.1
INT1: I2C6.1 J_INT1.1 R41.1
INT2: I2C10.9 J_INT2.1 R42.1
INT3: I2C2.1 J_INT3.1 R49.1
INT4: I2C1.9 J_INT4.1 R50.1
INT5: I2C4.1 J_INT5.1 R57.1
INT6: I2C3.9 J_INT6.1 R58.1
INT7: IC17.5 INT1.1 J_CS1.1
INT_MISO: IC1.8 JP7.2 JP13.1 L298.5 Q3.3 R4.1
INT_MISO1: IC4.8 JP1.2 JP4.1 L1.5 Q6.3 R19.1
INT_MISO2: IC9.8 JP5.2 JP11.1 L2.5 Q9.3 R32.1
MA_A: IC2.2 J_PA0.1 J_PA2.3 L298.6 VNH2SP30.5
MA_A1: IC8.2 J_PA1.1 J_PA4.3 L1.6 VNH2SP1.5
MA_A2: IC12.2 J_PA8.1 J_PA9.3 L2.6 VNH2SP2.5
MA_B: IC2.4 J_PB0.3 J_PB2B.1 L298.4 VNH2SP30.6
MA_B1: IC8.4 J_PB1.3 J_PB2B1.1 L1.4 VNH2SP1.6
MA_B2: IC12.4 J_PB2.3 J_PB2B2.1 L2.4 VNH2SP2.6
MA_CS: R6.1 VNH2SP30.4
MA_CS1: R21.1 VNH2SP1.4
MA_CS2: R34.1 VNH2SP2.4
MA_CS_: C4.2 IC1.10 J_PA3.2 R6.2 R12.2
MA_CS_1: C12.2 IC4.10 J_PA5.2 R21.2 R25.2
MA_CS_2: C20.2 IC9.10 J_PA10.2 R34.2 R38.2
MA_E1: M.9 R3.2
MA_E1_: C3.1 J_PA1A.3 J_PB2A.1 R3.1
MA_E1_1: C11.1 J_PA1A1.3 J_PB2A1.1 R18.1
MA_E1_2: C19.1 J_PA1A2.3 J_PB2A2.1 R31.1
MA_E2: J_PA1B.2 J_PB0.1 M.11
MA_E3: M1.9 R18.2
MA_E4: J_PA1B1.2 J_PB1.1 M1.11
MA_E5: M2.9 R31.2
MA_E6: J_PA1B2.2 J_PB2.1 M2.11
MA_EN__MB_A: IC1.3 IC5.2 L298.10 VNH2SP30.3
MA_EN__MB_A1: IC4.3 IC7.2 L1.10 VNH2SP1.3
MA_EN__MB_A2: IC9.3 IC11.2 L2.10 VNH2SP2.3
MA_N [Power]: M.3 MA.1
MA_N1 [Power]: M1.3 MA1.1
MA_N2 [Power]: M2.3 MA2.1
MA_P [Power]: M.1 MA.2
MA_P1 [Power]: M1.1 MA1.2
MA_P2 [Power]: M2.1 MA2.2
MA_PWM: J_PA1A.1 J_PB2A.3 L298.2 VNH2SP30.7
MA_PWM1: J_PA1A1.1 J_PB2A1.3 L1.2 VNH2SP1.7
MA_PWM2: J_PA1A2.1 J_PB2A2.3 L2.2 VNH2SP2.7
MB_B: IC5.4 J_PA3.3 L298.8
MB_B1: IC7.4 J_PA5.3 L1.8
MB_B2: IC11.4 J_PA10.3 L2.8
MB_E1: M.10 R2.2
MB_E1_: C1.2 J_PA0.3 J_PA7.1 R2.1
MB_E1_1: C7.2 J_PA1.3 J_PA6.1 R17.1
MB_E1_2: C17.2 J_PA8.3 J_PA11.1 R30.1
MB_E2: J_PA3.1 M.12
MB_E3: J_PA5.1 M1.12
MB_E4: M1.10 R17.2
MB_E5: J_PA10.1 M2.12
MB_E6: M2.10 R30.2
MB_N [Power]: M.4 MB.2
MB_N1 [Power]: M1.4 MB1.2
MB_N2 [Power]: M2.4 MB2.2
MB_P [Power]: M.2 MB.1
MB_P1 [Power]: M1.2 MB1.1
MB_P2 [Power]: M2.2 MB2.1
MB_PWM: J_PA2.1 J_PA7.3 L298.12
MB_PWM1: J_PA4.1 J_PA6.3 L1.12
MB_PWM2: J_PA9.1 J_PA11.3 L2.12
N$1: LED1.A R24.1
N$2: 100K.1 P_UM.1
N$3: IC7.1 IC8.1 JP4.2 R26.1
N$4: IC2.1 IC5.1 JP13.2 R13.1
N$5: 100K1.1 P_UM1.1
N$6: LED.A R7.1
N$7: LED2.A R37.1
N$8: IC11.1 IC12.1 JP11.2 R39.1
N$9: 100K2.1 P_UM2.1
N$10: IC14.2 Q11.2
N$11: IC14.3 Q11.1
N$12: IC15.2 Q12.2
N$13: IC15.3 Q12.1
N$30: IC13.2 Q10.2
N$31: IC13.3 Q10.1
NRST: IC13.6 J_RESET.2 NRST.1 R40.1 R.12
NRST1: IC14.6 J_RESET1.2 NRST1.1 R47.12 R48.1
NRST2: IC15.6 J_RESET2.2 NRST2.1 R55.12 R56.1
PA0: 10K.2 100K.2 C6.2 IC1.13 J_PA0.2 LED.C
PA1: IC1.12 J_PA1A.2 J_PA1B.1
PA2: IC1.11 J_PA2.2
PA3: 10K1.2 100K1.2 C16.2 IC4.13 J_PA1.2 LED1.C
PA4: IC4.12 J_PA1A1.2 J_PA1B1.1
PA5: IC4.11 J_PA4.2
PA6: IC4.6 J_PA6.2
PA7: IC1.6 J_PA7.2
PA8: 10K2.2 100K2.2 C24.2 IC9.13 J_PA8.2 LED2.C
PA9: IC9.12 J_PA1A2.2 J_PA1B2.1
PA10: IC9.11 J_PA9.2
PA11: IC9.6 J_PA11.2
PA12: IC13.7 L.5
PA13: IC13.8 L.6
PA14: IC13.9 L.7
PA15: IC13.10 L.8
PA16: IC13.11 L.9
PA17: IC13.12 L.10
PA18: IC13.18 R.4
PA19: IC13.19 R.5
PA20: IC13.13 L.11
PA21: IC13.14 L.12
PA22: IC13.21 J_INT2.2 R.7
PA23: IC14.7 L3.5
PA24: IC14.8 L3.6
PA25: IC14.9 L3.7
PA26: IC14.10 L3.8
PA27: IC14.11 L3.9
PA28: IC14.12 L3.10
PA29: IC14.18 R47.4
PA30: IC14.19 R47.5
PA31: IC14.13 L3.11
PA32: IC14.14 L3.12
PA33: IC14.21 J_INT4.2 R47.7
PA34: IC15.7 L4.5
PA35: IC15.8 L4.6
PA36: IC15.9 L4.7
PA37: IC15.10 L4.8
PA38: IC15.11 L4.9
PA39: IC15.12 L4.10
PA40: IC15.18 R55.4
PA41: IC15.19 R55.5
PA42: IC15.13 L4.11
PA43: IC15.14 L4.12
PA44: IC15.21 J_INT6.2 R55.7
PA45: IC16.13 PA0.1
PA46: IC16.6 PA7.1
PA47: IC16.10 PA3.1
PA48: IC16.11 PA2.1
PA49: IC16.12 PA1.1
PA50: IC17.13 PA4.1
PA51: IC17.6 PA9.1
PA52: IC17.10 PA8.1
PA53: IC17.11 PA6.1
PA54: IC17.12 PA5.1
PB0: IC1.2 J_PB0.2
PB1: IC4.2 J_PB1.2
PB2: IC1.5 J_PB2A.2 J_PB2B.2
PB3: IC4.5 J_PB2A1.2 J_PB2B1.2
PB4: IC9.2 J_PB2.2
PB5: IC9.5 J_PB2A2.2 J_PB2B2.2
PB6: IC13.16 R.2
PB7: IC13.30 L.1
PB8: IC13.15 R.1
PB9: IC13.31 L.2
PB10: IC14.16 R47.2
PB11: IC14.17 R47.3
PB12: IC14.30 L3.1
PB13: IC14.15 R47.1
PB14: IC14.31 L3.2
PB15: IC13.17 R.3
PB16: IC15.16 R55.2
PB17: IC15.17 R55.3
PB18: IC15.30 L4.1
PB19: IC15.15 R55.1
PB20: IC15.31 L4.2
PB21: IC16.3 PB1.1
PB22: IC16.2 PB0.1
PB23: IC17.3 PB3.1
PB24: IC17.2 PB2.1
PC1: IC14.20 J_INT3.2 R47.6
PC2: IC15.20 J_INT5.2 R55.6
PC6: IC13.20 J_INT1.2 R.6
RESET: SV1.5 SV2.5 SV3.5 SV4.5 SV5.5 SV7.5 SV8.5
SCL: SV1.3 SV2.3 SV3.7 SV4.7 SV5.3 SV7.7 SV8.3
SCL1: I2C6.3 IC13.32 L.3 R43.1
SCL2: I2C10.7 IC13.22 R46.1 R.8
SCL3: I2C2.3 IC14.32 L3.3 R51.1
SCL4: I2C1.7 IC14.22 R47.8 R54.1
SCL5: I2C4.3 IC15.32 L4.3 R59.1
SCL6: I2C3.7 IC15.22 R55.8 R62.1
SCL_SCK: IC1.9 JP8.2 L298.7 Q1.3 R8.1
SCL_SCK1: IC4.9 JP2.2 L1.7 Q4.3 R22.1
SCL_SCK2: IC9.9 JP6.2 L2.7 Q7.3 R35.1
SDA: SV1.4 SV2.4 SV3.1 SV4.1 SV5.4 SV7.1 SV8.4
SDA1: I2C6.4 IC13.1 L.4 R44.1
SDA2: I2C10.1 IC13.23 R45.1 R.9
SDA3: I2C2.4 IC14.1 L3.4 R52.1
SDA4: I2C1.1 IC14.23 R47.9 R53.1
SDA5: I2C4.4 IC15.1 L4.4 R60.1
SDA6: I2C3.1 IC15.23 R55.9 R61.1
SDA_MOSI: IC1.7 JP9.2 L298.9 Q2.3 R11.1
SDA_MOSI1: IC4.7 JP3.2 L1.9 Q5.3 R16.1
SDA_MOSI2: IC9.7 JP10.2 L2.9 Q8.3 R29.1
SPI1_MISO: IC13.28 SPI.1
SPI1_MISO1: IC14.28 SPI1.1
SPI1_MISO2: IC15.28 SPI2.1
SPI1_MOSI: IC13.29 SPI.4
SPI1_MOSI1: IC14.29 SPI1.4
SPI1_MOSI2: IC15.29 SPI2.4
SPI1_SCK: IC13.27 SPI.3
SPI1_SCK1: IC14.27 SPI1.3
SPI1_SCK2: IC15.27 SPI2.3
SPI1_SS: IC13.26 SPI.5
SPI1_SS1: IC14.26 SPI1.5
SPI1_SS2: IC15.26 SPI2.5
SWCLK: IC13.25 R.11 SWCLK.1
SWCLK1: IC14.25 R47.11 SWCLK1.1
SWCLK2: IC15.25 R55.11 SWCLK2.1
SWDIO: IC13.24 R.10 SWDIO.1
SWDIO1: IC14.24 R47.10 SWDIO1.1
SWDIO2: IC15.24 R55.10 SWDIO2.1
U1: C13.1 IC6.1 J_PWR1.1 L1.1 L1.11 VNH2SP1.1
U2: C21.1 IC10.1 J_PWR2.1 L2.1 L2.11 VNH2SP2.1
U3 [Power]: I2C10.4 L.14
U4 [Power]: I2C1.4 L3.14
U5: C5.1 IC3.1 J_PWR.1 L298.1 L298.11 VNH2SP30.1
U6 [Power]: I2C3.4 L4.14
U14: SV3.4 SV4.4 SV7.4
U14SW: SV3.6 SV4.6 SV7.6
U33: SV1.2 SV2.2 SV3.2 SV4.2 SV5.2 SV7.2 SV8.2
U_BUS: BUS.2 J_PWR.3 Q1.1 Q2.1 Q3.1 R5.1 R9.1 R10.1
U_BUS1: BUS1.2 J_PWR1.3 Q4.1 Q5.1 Q6.1 R15.1 R20.1 R23.1
U_BUS2: BUS2.2 J_PWR2.3 Q7.1 Q8.1 Q9.1 R28.1 R33.1 R36.1
UBAT [Power]: I2C10.6 L.13
UBAT1 [Power]: I2C1.6 L3.13
UBAT2 [Power]: I2C3.6 L4.13
VCC: C2.1 C8.1 C10.+ IC1.1 IC2.5 IC3.3 IC5.5 J_PWR.2 M.7 M.8 R1.1 R4.2 R7.2 R8.2 R11.2 R13.2
VCC1: C9.1 C14.1 C15.+ IC4.1 IC6.3 IC7.5 IC8.5 J_PWR1.2 M1.7 M1.8 R14.1 R16.2 R19.2 R22.2 R24.2 R26.2
VCC2: C18.1 C22.1 C23.+ IC9.1 IC10.3 IC11.5 IC12.5 J_PWR2.2 M2.7 M2.8 R27.1 R29.2 R32.2 R35.2 R37.2 R39.2
VCC3 [Power]: C25.1 C26.+ I2C6.2 I2C10.2 IC13.4 R40.2 R41.2 R42.2 R43.2 R44.2 R45.2 R46.2 R.14 SPI.2
VCC4 [Power]: C27.1 C28.+ I2C1.2 I2C2.2 IC14.4 R47.14 R48.2 R49.2 R50.2 R51.2 R52.2 R53.2 R54.2 SPI1.2
VCC5 [Power]: C29.1 C30.+ I2C3.2 I2C4.2 IC15.4 R55.14 R56.2 R57.2 R58.2 R59.2 R60.2 R61.2 R62.2 SPI2.2
VCC6: C31.1 IC16.1 R63.1 R64.1 R65.1 R66.1 R67.1 VCC.1 X1.2
VCC7: C32.1 IC17.1 R68.1 R69.1 R70.1 R71.1 R72.1 VCC1.1 X2.2

## Tracks (layer width: path | path; a pad name or v marks a point on that pad's centre or on a via)
BUS_INT
  Bottom 0.254: R10.2 2.38,16.04 | 2.38,16.04 3.49,14.93 BUS.1 | 2.38,16.04 3.2,16.85 3.2,17.06 3.36,17.22 4.89,17.22 5.05,17.06 5.05,14.39 5.04,14.38 5.04,13.56 5.62,12.98 6.44,12.98 7.02,13.56 7.02,14.37 Q3.2 8.5,15.85 JP7.1
BUS_INT1
  Bottom 0.254: R15.2 2.38,44.61 | 2.38,44.61 3.49,43.5 BUS1.1 | 2.38,44.61 3.2,45.42 3.2,45.63 3.36,45.8 4.89,45.8 5.05,45.63 5.05,42.97 5.04,42.95 5.04,42.13 5.62,41.55 6.44,41.55 7.02,42.13 7.02,42.95 Q6.2 8.5,44.42 JP1.1
BUS_INT2
  Bottom 0.254: R28.2 2.38,73.19 | 2.38,73.19 3.49,72.08 BUS2.1 | 2.38,73.19 3.2,74 3.2,74.21 3.36,74.37 4.89,74.37 5.05,74.21 5.05,71.54 5.04,71.53 5.04,70.71 5.62,70.13 6.44,70.13 7.02,70.71 7.02,71.52 Q9.2 8.5,73 JP5.1
BUS_INT3  (via drill 0.35)
  Top 0.127: v41.18,67.31 41.18,66.94 41.66,66.46 41.66,65.62 41.06,65.02 40.73,65.02 39.37,63.67 v39.37,61.91 39.37,62.23 R66.2 | INT.1 40.01,70.48 39.37,70.48 39.2,70.32 v39.2,69.9
  Bottom 0.127: IC16.8 39.37,62.8 v39.37,61.91 | v41.18,67.31 40.93,67.56 40.22,67.56 39.2,68.58 v39.2,69.9
  Bottom 0.406: INT.1 41.91,72.39 41.91,74.93 39.05,74.93 X1.1
BUS_INT4  (via drill 0.35)
  Top 0.127: v70.39,67.31 70.39,66.94 70.87,66.46 70.87,65.62 70.27,65.02 69.94,65.02 68.58,63.67 v68.58,61.91 68.58,62.23 R71.2 | INT2.1 69.21,70.48 68.58,70.48 68.41,70.32 v68.41,69.9
  Bottom 0.127: IC17.8 68.58,62.8 v68.58,61.91 | v70.39,67.31 70.14,67.56 69.43,67.56 68.41,68.58 v68.41,69.9
  Bottom 0.406: INT2.1 71.12,72.39 71.12,74.93 68.26,74.93 X2.1
BUS_P1  (via drill 0.35)
  Top 0.127: R72.2 67.81,69.36 68.64,69.36 69.13,69.85 70.69,69.85 v70.74,69.9 | v71.02,64.54 69.98,63.5 CS1.1
  Top 0.406: R72.2 64.45,72.71 64.45,74.3 62.55,76.2 X2.5
  Bottom 0.127: v70.74,69.9 71.15,69.49 71.15,67.72 71.21,67.65 71.21,64.73 v71.02,64.54
  Bottom 0.406: J_CS1.2 61.28,75.56 X2.5
BUS_P5  (via drill 0.35)
  Top 0.127: R67.2 38.6,69.36 39.43,69.36 39.92,69.85 41.48,69.85 v41.53,69.9 | v41.81,64.54 40.77,63.5 CS.1
  Top 0.406: R67.2 35.24,72.71 35.24,74.3 33.34,76.2 X1.5
  Bottom 0.127: v41.53,69.9 41.94,69.49 41.94,67.72 42,67.65 42,64.73 v41.81,64.54
  Bottom 0.406: J_CS.2 32.07,75.56 X1.5
BUS_RESET
  Bottom 0.254: BUS.5 3.49,6.14 D2.C
BUS_RESET1
  Bottom 0.254: BUS1.5 3.49,34.72 D1.C
BUS_RESET2
  Bottom 0.254: BUS2.5 3.49,63.3 D3.C
BUS_RESET3
  Top 0.127: I2C10.5 38.7,5.1 38.7,9.36 37.17,10.9 37.17,13.06 36.26,13.97 I2C6.5
  Bottom 0.127: J_RESET.1 43.8,27.17 43.8,26.12 36.89,19.21 36.89,14.6 36.26,13.97 I2C6.5
BUS_RESET4
  Top 0.127: I2C1.5 59.02,5.1 59.02,9.36 57.49,10.9 57.49,13.06 56.58,13.97 I2C2.5
  Bottom 0.127: J_RESET1.1 64.12,27.17 64.12,26.12 57.21,19.21 57.21,14.6 56.58,13.97 I2C2.5
BUS_RESET5
  Top 0.127: I2C3.5 79.34,5.1 79.34,9.36 77.81,10.9 77.81,13.06 76.9,13.97 I2C4.5
  Bottom 0.127: J_RESET2.1 84.44,27.17 84.44,26.12 77.53,19.21 77.53,14.6 76.9,13.97 I2C4.5
BUS_RESET6  (via drill 0.35)
  Top 0.406: v29.87,70.48 29.87,69.4 D4.C
  Bottom 0.406: J_CS.3 29.87,74.14 v29.87,70.48
BUS_RESET7  (via drill 0.35)
  Top 0.406: v59.08,70.48 59.08,69.4 D5.C
  Bottom 0.406: J_CS1.3 59.08,74.14 v59.08,70.48
BUS_SCL  (via drill 0.3)
  Top 0.254: v4.67,10.89 5.68,9.88 6.44,9.88 6.45,9.87 v6.7,9.87
  Bottom 0.254: R5.2 3.16,11.76 BUS.3 4.13,11.43 v4.67,10.89 | JP8.1 8.53,9.53 Q1.2 7.54,9.87 v6.7,9.87
BUS_SCL1  (via drill 0.3)
  Top 0.254: v4.67,39.47 5.68,38.46 6.44,38.46 6.45,38.45 v6.7,38.45
  Bottom 0.254: R20.2 3.16,40.34 BUS1.3 4.13,40.01 v4.67,39.47 | JP2.1 8.53,38.1 Q4.2 7.54,38.45 v6.7,38.45
BUS_SCL2  (via drill 0.3)
  Top 0.254: v4.67,68.04 5.68,67.03 6.44,67.03 6.45,67.02 v6.7,67.02
  Bottom 0.254: R33.2 3.16,68.91 BUS2.3 4.13,68.58 v4.67,68.04 | JP6.1 8.53,66.67 Q7.2 7.54,67.02 v6.7,67.02
BUS_SCL3  (via drill 0.35)
  Top 0.127: 41.28,68.58 42.07,69.37 42.07,71.33 41,72.39 40.28,72.39 39.48,73.18 39.48,73.54
  Top 0.406: 41.28,68.58 SCL.1 36.83,68.58 36.51,68.26 R65.2 | 39.48,73.54 v39.36,73.66 | v37.54,74.25 35.58,76.2 X1.3
  Bottom 0.127: IC16.9 36.68,64.22 36.68,65.06 36.39,65.35 35.23,65.35 32.7,67.88 32.7,70.64 32.35,70.99 32.35,73.52 33.36,74.54 37.25,74.54 v37.54,74.25
  Bottom 0.406: v39.36,73.66 38.12,73.66 v37.54,74.25
BUS_SCL4  (via drill 0.35)
  Top 0.127: 70.49,68.58 71.28,69.37 71.28,71.33 70.21,72.39 69.49,72.39 68.69,73.18 68.69,73.54
  Top 0.406: 70.49,68.58 SCL1.1 66.04,68.58 65.72,68.26 R70.2 | 68.69,73.54 v68.57,73.66 | v66.75,74.25 64.79,76.2 X2.3
  Bottom 0.127: IC17.9 65.89,64.22 65.89,65.06 65.6,65.35 64.44,65.35 61.91,67.88 61.91,70.64 61.56,70.99 61.56,73.52 62.57,74.54 66.46,74.54 v66.75,74.25
  Bottom 0.406: v68.57,73.66 67.33,73.66 v66.75,74.25
BUS_SDA
  Bottom 0.254: R9.2 2.83,9.62 3.08,9.88 4.48,9.88 BUS.4 6.77,12.17 6.78,12.17 6.99,12.38 Q2.2 8.5,12.68 JP9.1
BUS_SDA1
  Bottom 0.254: R23.2 2.83,38.2 3.08,38.46 4.48,38.46 BUS1.4 6.77,40.74 6.78,40.74 6.99,40.95 Q5.2 8.5,41.25 JP3.1
BUS_SDA2
  Bottom 0.254: R36.2 2.83,66.77 3.08,67.03 4.48,67.03 BUS2.4 6.77,69.32 6.78,69.32 6.99,69.53 Q8.2 8.5,69.83 JP10.1
BUS_SDA3  (via drill 0.35)
  Top 0.127: v39.37,67.31 R64.2 38.42,67.62 v38.42,67.9
  Top 0.406: v39.37,67.31 SDA.1
  Bottom 0.127: IC16.7 v38.42,67.9
  Bottom 0.406: IC16.7 38.42,71.44 37.21,72.64 36.09,72.64 35.08,73.66 X1.4
BUS_SDA4  (via drill 0.35)
  Top 0.127: v68.58,67.31 R69.2 67.63,67.62 v67.63,67.9
  Top 0.406: v68.58,67.31 SDA1.1
  Bottom 0.127: IC17.7 v67.63,67.9
  Bottom 0.406: IC17.7 67.63,71.44 66.42,72.64 65.3,72.64 64.29,73.66 X2.4
DEBUGWIRE  (via drill 0.3)
  Top 0.127: DW.1 2.27,2.52 4.44,0.35 14.69,0.35 14.92,0.58 14.92,1.1 v14.87,1.15
  Bottom 0.127: 6.46,4.19 6.46,5.66 D2.A | 6.46,4.19 6.46,3.84 R1.2 6.46,4.19 | 6.46,4.19 3.88,4.19 2.27,2.58 DW.1 | IC1.4 14.92,1.2 v14.87,1.15
DEBUGWIRE1  (via drill 0.3)
  Top 0.127: DW1.1 2.27,31.09 4.44,28.92 14.69,28.92 14.92,29.16 14.92,29.67 v14.87,29.72
  Bottom 0.127: 6.46,32.77 6.46,34.23 D1.A | 6.46,32.77 6.46,32.42 R14.2 6.46,32.77 | 6.46,32.77 3.88,32.77 2.27,31.16 DW1.1 | IC4.4 14.92,29.77 v14.87,29.72
DEBUGWIRE2  (via drill 0.3)
  Top 0.127: DW2.1 2.27,59.66 4.44,57.5 14.69,57.5 14.92,57.73 14.92,58.25 v14.87,58.3
  Bottom 0.127: 6.46,61.34 6.46,62.81 D3.A | 6.46,61.34 6.46,60.99 R27.2 6.46,61.34 | 6.46,61.34 3.88,61.34 2.27,59.73 DW2.1 | IC9.4 14.92,58.35 v14.87,58.3
DW  (via drill 0.35)
  Top 0.406: D4.A 33.83,68.96 | 33.83,68.96 IC16.4 | R63.2 33.83,66.78 33.83,68.96
  Bottom 0.406: DW3.1 34.61,70.17 IC16.4
  other vias: 34.61,68.96
DW1  (via drill 0.35)
  Top 0.406: D5.A 63.04,68.96 | 63.04,68.96 IC17.4 | R68.2 63.04,66.78 63.04,68.96
  Bottom 0.406: DW4.1 63.82,70.17 IC17.4
  other vias: 63.82,68.96
FON  (via drill 0.3)
  Top 0.508: v43.18,82.87 43.82,83.5 47.62,83.5 49.21,81.92 SV4.3
  Bottom 0.508: SV4.3 49.85,82.23 49.85,86.68 50.8,87.63 50.8,89.85 49.53,91.12 SV7.3 | SV3.3 35.24,80.64 43.18,80.64 v43.18,82.87
GND  (via drill 0.3, 0.35)
  Top 0.127: IC3.2 21.2,9.29 22.81,7.68 v23.37,7.68 | 6.05,2.52 4.79,2.52 DW.2 | 6.05,2.52 6.81,2.52 C10.- | 6.05,2.52 6.05,8.87 BUS.6 5.98,8.94 4.79,8.94 3.25,10.48 3.11,10.48 2.55,11.04 2.55,17.25 v2.9,17.6 | 6.05,2.52 C10.- | 24.49,23.89 24.49,25.7 PAD1.1 | 24.49,23.89 24.49,23.75 IC5.3 24.49,23.89 | 24.49,23.89 21.41,23.89 20.43,22.91 19.39,22.91 L298.3 19.32,22.91 19.32,23.4 15.96,26.75 12.61,26.75 10.52,24.66 10.52,22.91 M.5 | v23.16,20.82 23.16,22.21 v23.09,22.28 | C10.- 7.51,1.9 v7.51,1.65 | v11.55,17.78 10.48,18.85 M.6
  Top 0.15: 10K.1 C6.1 11.29,15.07 v10.94,15.43
  Bottom 0.127: C2.2 20.09,6.64 20.09,8.03 19.88,8.24 C4.1 | v23.37,7.68 23.16,7.68 22.25,8.59 R12.1 22.18,8.73 23.93,10.48 23.93,12.22 25.67,13.97 VNH2SP30.2 25.6,13.97 23.93,15.65 23.93,16.9 24.56,17.53 24.56,18.86 C8.2 24.56,18.93 24.56,19.42 v23.16,20.82 | C3.2 5.49,25.43 7.58,25.43 C1.1 7.65,25.43 7.79,25.43 8.77,26.4 10.59,26.4 11.21,25.77 11.21,23.68 10.52,22.98 M.5 | IC2.3 26.3,23.75 26.3,24.03 24.63,25.7 24.49,25.7 PAD1.1 24.83,25.43 23.09,23.68 v23.09,22.28 | v2.9,17.6 5.56,17.6 7.16,19.21 8.7,19.21 9.68,18.23 C5.2 | v10.94,15.43 10.94,16.85 11.18,17.09 11.18,17.41 v11.55,17.78
  Bottom 0.254: M.5 M.6 10.48,18.91 C5.2 | IC1.14 19.84,8.32 C4.1 R12.1
  other vias: 5.14,5.87 5.12,7.92 7.1,7.98 1.59,24.77 1.59,26.04 9.21,21.59 20.64,19.05 26.99,12.7 26.99,10.16 26.99,7.62 26.99,5.08 26.99,2.54 14.29,4.76 18.94,0.97 23.3,2.34 23.81,4.45
  pour Top: 0.32,0 27.94,0 27.94,27.3 0.32,27.3
  pour Bottom: 0.32,0 27.94,0 27.94,27.3 0.32,27.3
GND1  (via drill 0.3, 0.35)
  Top 0.127: IC6.2 21.2,37.87 22.81,36.26 v23.37,36.26 | 6.05,31.09 4.79,31.09 DW1.2 | 6.05,31.09 6.81,31.09 C15.- | 6.05,31.09 6.05,37.45 BUS1.6 5.98,37.52 4.79,37.52 3.25,39.05 3.11,39.05 2.55,39.61 2.55,45.83 v2.9,46.18 | 6.05,31.09 C15.- | 24.49,52.46 24.49,54.28 PAD2.1 | 24.49,52.46 24.49,52.32 IC7.3 24.49,52.46 | 24.49,52.46 21.41,52.46 20.43,51.49 19.39,51.49 L1.3 19.32,51.49 19.32,51.98 15.96,55.33 12.61,55.33 10.52,53.23 10.52,51.49 M1.5 | v23.16,49.39 23.16,50.79 v23.09,50.86 | C15.- 7.51,30.48 v7.51,30.23 | v11.55,46.35 10.48,47.42 M1.6
  Top 0.15: 10K1.1 C16.1 11.29,43.65 v10.94,44
  Bottom 0.127: C9.2 20.09,35.21 20.09,36.61 19.88,36.82 C12.1 | v23.37,36.26 23.16,36.26 22.25,37.17 R25.1 22.18,37.31 23.93,39.05 23.93,40.8 25.67,42.55 VNH2SP1.2 25.6,42.55 23.93,44.22 23.93,45.48 24.56,46.11 24.56,47.43 C14.2 24.56,47.5 24.56,47.99 v23.16,49.39 | C11.2 5.49,54 7.58,54 C7.1 7.65,54 7.79,54 8.77,54.98 10.59,54.98 11.21,54.35 11.21,52.25 10.52,51.56 M1.5 | IC8.3 26.3,52.32 26.3,52.6 24.63,54.28 24.49,54.28 PAD2.1 24.83,54 23.09,52.25 v23.09,50.86 | v2.9,46.18 5.56,46.18 7.16,47.78 8.7,47.78 9.68,46.81 C13.2 | v10.94,44 10.94,45.43 11.18,45.67 11.18,45.98 v11.55,46.35
  Bottom 0.254: M1.5 M1.6 10.48,47.49 C13.2 | IC4.14 19.84,36.89 C12.1 22.16,37.2 R25.1
  other vias: 5.14,34.44 5.12,36.5 7.1,36.55 1.59,53.34 1.59,54.61 9.21,50.16 20.64,47.62 26.99,41.27 26.99,38.73 26.99,36.2 26.99,33.66 26.99,31.11 14.29,33.34 18.94,29.54 23.3,30.91 23.81,33.02
  pour Top: 0.32,28.57 27.94,28.57 27.94,55.88 0.32,55.88
  pour Bottom: 0.32,28.57 27.94,28.57 27.94,55.88 0.32,55.88
GND2  (via drill 0.3, 0.35)
  Top 0.127: IC10.2 21.2,66.44 22.81,64.83 v23.37,64.83 | 6.05,59.66 4.79,59.66 DW2.2 | 6.05,59.66 6.81,59.66 C23.- | 6.05,59.66 6.05,66.02 BUS2.6 5.98,66.09 4.79,66.09 3.25,67.63 3.11,67.63 2.55,68.19 2.55,74.4 v2.9,74.75 | 6.05,59.66 C23.- | 24.49,81.04 24.49,82.86 PAD3.1 | 24.49,81.04 24.49,80.9 IC11.3 24.49,81.04 | 24.49,81.04 21.41,81.04 20.43,80.06 19.39,80.06 L2.3 19.32,80.06 19.32,80.55 15.96,83.9 12.61,83.9 10.52,81.81 10.52,80.06 M2.5 | v23.16,77.97 23.16,79.36 v23.09,79.43 | C23.- 7.51,59.05 v7.51,58.8 | v11.55,74.93 10.48,76 M2.6
  Top 0.15: 10K2.1 C24.1 11.29,72.22 v10.94,72.58
  Bottom 0.127: C18.2 20.09,63.79 20.09,65.18 19.88,65.39 C20.1 | v23.37,64.83 23.16,64.83 22.25,65.74 R38.1 22.18,65.88 23.93,67.63 23.93,69.37 25.67,71.12 VNH2SP2.2 25.6,71.12 23.93,72.8 23.93,74.05 24.56,74.68 24.56,76.01 C22.2 24.56,76.08 24.56,76.57 v23.16,77.97 | C19.2 5.49,82.58 7.58,82.58 C17.1 7.65,82.58 7.79,82.58 8.77,83.55 10.59,83.55 11.21,82.92 11.21,80.83 10.52,80.13 M2.5 | IC12.3 26.3,80.9 26.3,81.18 24.63,82.86 24.49,82.86 PAD3.1 24.83,82.58 23.09,80.83 v23.09,79.43 | v2.9,74.75 5.56,74.75 7.16,76.36 8.7,76.36 9.68,75.38 C21.2 | v10.94,72.58 10.94,74 11.18,74.24 11.18,74.56 v11.55,74.93
  Bottom 0.254: M2.5 M2.6 10.48,76.06 C21.2 | IC9.14 19.84,65.47 C20.1 R38.1
  other vias: 5.14,63.02 5.12,65.07 7.1,65.13 1.59,81.92 1.59,83.19 9.21,78.74 20.64,76.2 26.99,69.85 26.99,67.31 26.99,64.77 26.99,62.23 26.99,59.69 14.29,61.91 18.94,58.12 23.3,59.49 23.81,61.59
  pour Top: 0.32,57.15 27.94,57.15 27.94,84.45 0.32,84.45
  pour Bottom: 0.32,57.15 27.94,57.15 27.94,84.45 0.32,84.45
GND3  (via drill 0.3, 0.35)
  Top 0.635: 35,2.58 36.19,2.58 I2C10.8 | 35,2.58 33.67,2.58 I2C10.10 | 35,2.58 35,5.59 36.19,6.78 36.19,11.39 I2C6.6 | GND.1 47.09,32.27 46.39,32.97 R.13 46.04,33.04 v42.34,36.74 | v35.84,23.47 35.84,25.5 35.21,26.12 IC13.5 35,26.4 33.95,27.45 33.95,29.48 35.14,30.66 v36.96,30.66
  Bottom 0.635: C25.2 34.3,22.49 35.84,22.49 36.4,21.93 C26.- | v35.84,23.47 35.84,22.77 C26.- | v36.96,30.66 36.19,31.43 36.19,32.97 SPI.6 36.4,33.25 37.38,34.23 37.38,35.9 38.21,36.74 v42.34,36.74 | I2C6.6 36.19,11.46 36.19,12.29 35,13.48 35,16.07 36.33,17.39 36.33,21.58 C26.-
  other vias: 40.64,24.13 41.91,22.86 44.58,22.61 43.82,34.92 43.82,36.83 30.48,36.83 31.75,36.83 42.42,9.65 41.28,8.26 41.91,7.62 46.36,19.05 46.36,21.59 46.36,13.97 46.36,11.43 38.1,26.67 35.18,34.8
  pour Top: 29.21,0 48.26,0 48.26,38.1 29.21,38.1
  pour Bottom: 29.21,0 48.26,0 48.26,38.1 29.21,38.1
GND4  (via drill 0.3, 0.35)
  Top 0.635: 55.32,2.58 56.51,2.58 I2C1.8 | 55.32,2.58 53.99,2.58 I2C1.10 | 55.32,2.58 55.32,5.59 56.51,6.78 56.51,11.39 I2C2.6 | GND1.1 67.41,32.27 66.71,32.97 R47.13 66.36,33.04 v62.66,36.74 | v56.16,23.47 56.16,25.5 55.53,26.12 IC14.5 55.32,26.4 54.27,27.45 54.27,29.48 55.46,30.66 v57.28,30.66
  Bottom 0.635: C27.2 54.62,22.49 56.16,22.49 56.72,21.93 C28.- | v56.16,23.47 56.16,22.77 C28.- | v57.28,30.66 56.51,31.43 56.51,32.97 SPI1.6 56.72,33.25 57.7,34.23 57.7,35.9 58.53,36.74 v62.66,36.74 | I2C2.6 56.51,11.46 56.51,12.29 55.32,13.48 55.32,16.07 56.65,17.39 56.65,21.58 C28.-
  other vias: 60.96,24.13 62.23,22.86 64.9,22.61 64.14,34.92 64.14,36.83 50.8,36.83 52.07,36.83 62.74,9.65 61.6,8.26 62.23,7.62 66.67,19.05 66.67,21.59 66.67,13.97 66.67,11.43 58.42,26.67 55.5,34.8
  pour Top: 49.53,0 68.58,0 68.58,38.1 49.53,38.1
  pour Bottom: 49.53,0 68.58,0 68.58,38.1 49.53,38.1
GND5  (via drill 0.3, 0.35)
  Top 0.635: 75.64,2.58 76.83,2.58 I2C3.8 | 75.64,2.58 74.31,2.58 I2C3.10 | 75.64,2.58 75.64,5.59 76.83,6.78 76.83,11.39 I2C4.6 | GND2.1 87.73,32.27 87.03,32.97 R55.13 86.68,33.04 v82.98,36.74 | v76.48,23.47 76.48,25.5 75.85,26.12 IC15.5 75.64,26.4 74.59,27.45 74.59,29.48 75.78,30.66 v77.6,30.66
  Bottom 0.635: C29.2 74.94,22.49 76.48,22.49 77.04,21.93 C30.- | v76.48,23.47 76.48,22.77 C30.- | v77.6,30.66 76.83,31.43 76.83,32.97 SPI2.6 77.04,33.25 78.02,34.23 78.02,35.9 78.85,36.74 v82.98,36.74 | I2C4.6 76.83,11.46 76.83,12.29 75.64,13.48 75.64,16.07 76.97,17.39 76.97,21.58 C30.-
  other vias: 81.28,24.13 82.55,22.86 85.22,22.61 84.45,34.92 84.45,36.83 71.12,36.83 72.39,36.83 83.06,9.65 81.91,8.26 82.55,7.62 86.99,19.05 86.99,21.59 86.99,13.97 86.99,11.43 78.74,26.67 75.82,34.8
  pour Top: 69.85,0 88.9,0 88.9,38.1 69.85,38.1
  pour Bottom: 69.85,0 88.9,0 88.9,38.1 69.85,38.1
GND6  (via drill 0.35)
  Top 0.127: v30.8,63.5 30.8,63.82 30.95,63.97 C31.2
  Top 0.406: PAD104.1 PAD105.1 PAD103.1 | GND_.1 31.75,70.48 31.75,67.94 30.8,66.99 30.8,64.45 C31.2
  Bottom 0.406: IC16.14 v30.8,63.5 30.8,61.28 PAD104.1 | GND3.1 39.93,74.37 38.82,74.37 38.1,75.09 32.86,75.09 X1.6 31.11,73.34 GND_.1
GND7  (via drill 0.35)
  Top 0.127: v60.01,63.5 60.01,63.82 60.16,63.97 C32.2
  Top 0.406: PAD206.1 PAD207.1 PAD205.1 | GND_1.1 60.96,70.48 60.96,67.94 60.01,66.99 60.01,64.45 C32.2
  Bottom 0.406: IC17.14 v60.01,63.5 60.01,61.28 PAD206.1 | GND4.1 69.14,74.37 68.03,74.37 67.31,75.09 62.07,75.09 X2.6 60.33,73.34 GND_1.1
GND8
  pour Top: 29.21,78.11 86.99,78.11 86.99,92.71 29.21,92.71
  pour Bottom: 29.21,78.11 86.99,78.11 86.99,92.71 29.21,92.71
INT
  Top 0.508: SV5.1 69.53,83.5 81.91,83.5 83.5,81.92 SV1.1 | SV7.9 43.18,90.17 65.72,90.17 66.68,91.12 67.63,91.12 SV2.1
  Bottom 0.508: 37.31,86.52 33.34,90.49 SV3.9 | 37.31,86.52 SV4.9 | SV7.9 37.47,87 37.47,86.68 37.31,86.52 | SV5.1 69.53,83.5 69.53,89.53 67.94,91.12 SV2.1 | SV1.1 85.41,83.5 85.41,89.53 83.82,91.12 SV8.1
INT0  (via drill 0.35)
  Top 0.406: v32.89,72.71 32.45,73.15 32.45,74.08 31.43,75.1 v31.43,76.52
  Bottom 0.127: IC16.5 35.88,66.55 36.51,65.91 37.1,65.91 37.94,65.08 38.81,65.08 39.62,64.26 39.62,63.08 40.64,62.06 INT0.1
  Bottom 0.406: IC16.5 35.88,71.75 35.24,72.39 33.21,72.39 v32.89,72.71 | v31.43,76.52 31.29,76.38 J_CS.1
INT1
  Bottom 0.127: 43.31,13.97 43.31,15.23 J_INT1.1 | 43.31,13.97 R41.1 | I2C6.1 43.31,13.97
INT2  (via drill 0.3)
  Top 0.127: v34.72,8.94 34.72,6.15 I2C10.9
  Bottom 0.127: R42.1 33.67,6.01 33.67,5.1 I2C10.9 | v34.72,8.94 33.67,9.99 J_INT2.1
INT3
  Bottom 0.127: 63.63,13.97 63.63,15.23 J_INT3.1 | 63.63,13.97 R49.1 | I2C2.1 63.63,13.97
INT4  (via drill 0.3)